# Altium PCB PanelFK.PcbDoc
Units mil, origin at the board's own origin, x right, y up, seen from the top; angles counter-clockwise.
Board outline 6000 x 4000 mil, 2 copper layers (Top Layer, Bottom Layer); 23 components, 16 nets, 71 pads, 0 vias.
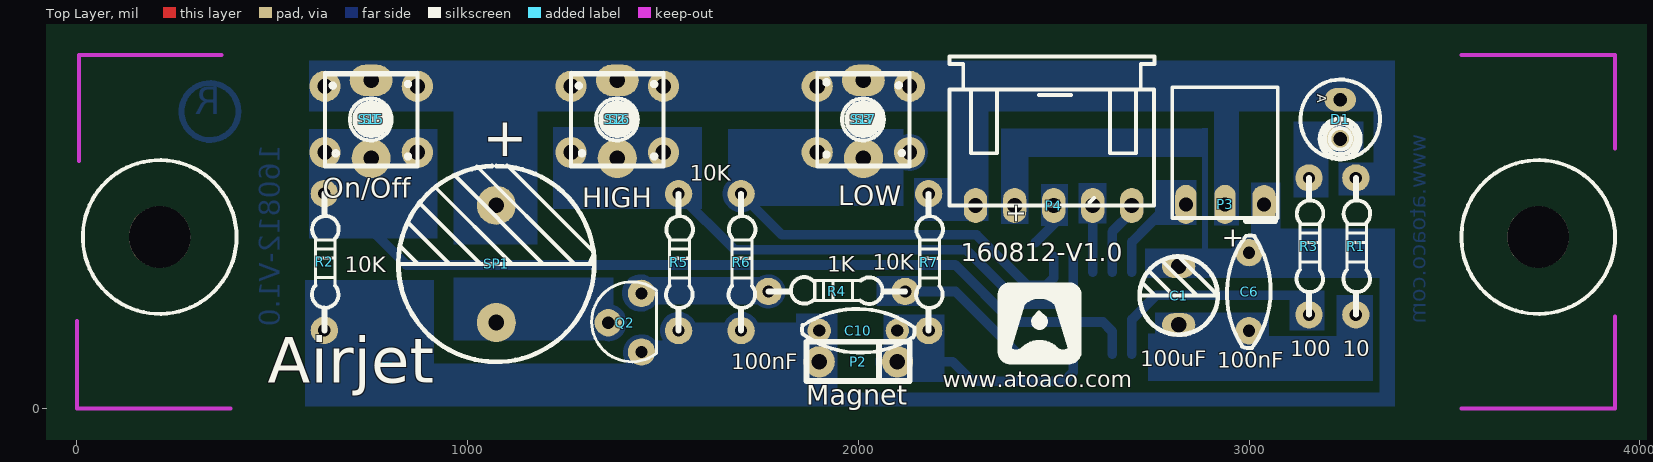
[diagram p0: Top Layer view]
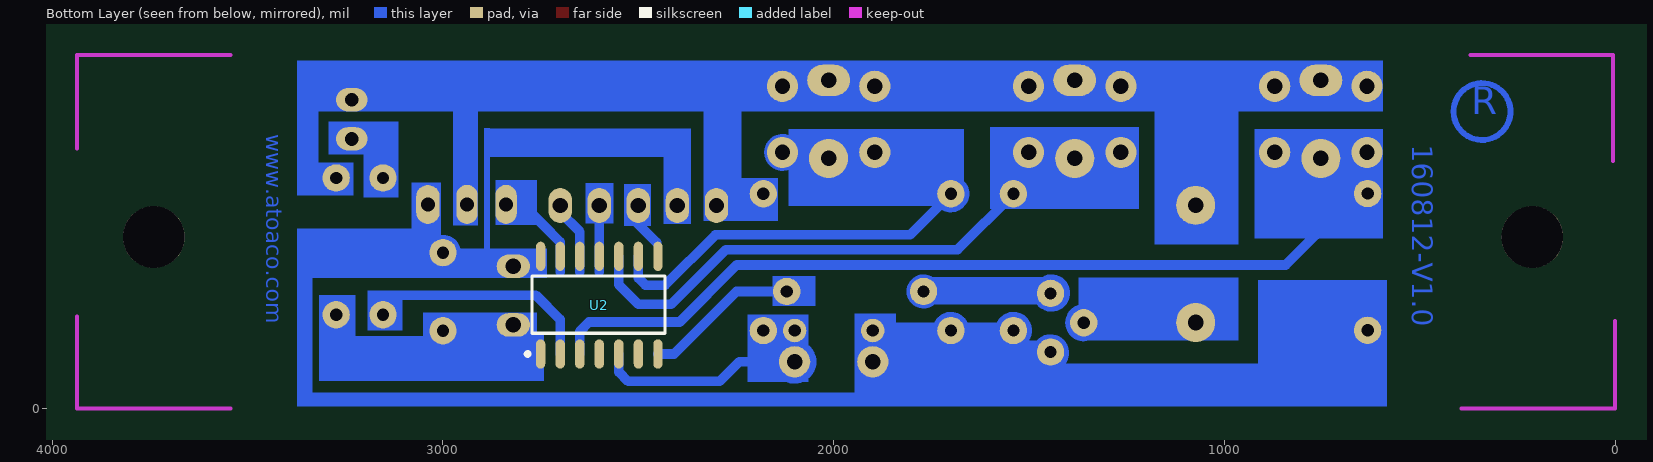
[diagram p1: Bottom Layer view, seen from below]

## Layer stack, top to bottom
Top Layer: signal copper 1.4
Dielectric: dielectric 12.6, FR-4, Dk 4.8
Bottom Layer: signal copper 1.4

## Board outline
-206.55,-741.53 5793.45,-741.53 5793.45,3258.47 -206.55,3258.47

## Design rules (kind name [scope] priority, off if disabled: settings)
Clearance [All] p1: gap=10
PolygonConnect [All] p1: connectstyle=Relief reliefconductorwidth=10 reliefentries=4 polygonreliefangle="90 Angle"
RoutingVias [All] p1: holewidth=28 width=50 viastyle="Through Hole" minholewidth=28 minwidth=50 maxholewidth=28 maxwidth=50
SolderMaskExpansion [All] p1: expansion=4
TestPointUsage [All] p1: valid=0 allowmultiple=FALSE
Testpoint [All] p1: side=15 testpointundercomponent=TRUE minsize=40 maxsize=100 preferedsize=60 minholesize=0 maxholesize=40 preferedholesize=32 testpointgrid=1 style=1023 order=0123456789
Width [All] p1: maxlimit=100 minlimit=10 preferedwidth=10 toplayer_prefwidth=25 bottomlayer_prefwidth=25 minimp=50.000000 maximp=50.000000 favimp=50.000000
19 further rules are at their usual default settings.

## Components (designator, comment, footprint, x,y, rotation, side; value= is the part's Value field where it differs from the comment)
C1 "100uF" RB.15/.2 2820,239.37 r90 top
C6 "100nF" RAD0.2#1 3000,399.37 r270 top
C10 "100nF" RAD0.2#2 1900,200 r0 top
D1 "RED" LED0.5 3233.46,740.55 r270 top
P2 "Magnet" Magnet 2100,120 r180 top
P3 "IrReceiver" IrRec1 2938.19,728.74 r0 top locked
P4 "Header 5" xH5RA 2300,520 r270 top
Q2 "2N3904" TO92BS2 1420,220 r270 top
R1 "10" RES0.35 3273.46,240.55 r90 top
R2 "10K" RES0.35 633.46,200.55 r90 top
R3 "100" RES0.35 3153.46,240.55 r90 top
R4 "1K" RES0.35 2120,300 r180 top
R5 "10K" RES0.35 1540,200 r90 top
R6 "10K" RES0.35 1700,200 r90 top
R7 "10K" RES0.35 2180,200 r90 top
S1 "On/Off" PUSHBOT2 753.15,740.55 r270 top locked
S2 "HIGH" PUSHBOT2 1383.07,740.55 r270 top locked
S3 "LOW" PUSHBOT2 2012.99,740.55 r270 top locked
S15 "100/2W" PUSHBOT4 753.15,740.55 r180 top locked
S16 "100/2W" PUSHBOT4 1383.07,740.55 r180 top locked
S17 "100/2W" PUSHBOT4 2012.99,740.55 r0 top locked
SP1 "BUZZER" RB.3/.6 1073.46,520.55 r90 top
U2 "ATtiny24A-SSU" SOIC14 2750,140 r90 bottom

## Footprints (in the part's own frame and the unit in brackets; to place one, negate y for a bottom-side part, rotate by r counter-clockwise, add the part's x,y. Pads: shape width x height; smd on the part's side, far side on the other; paste and mask are expansions set on the pad)
IrRec1 [mil] "38KHz Ir Receiver"
  oval 55x100 hole 35.43: 1(-99.65,-205.95) 2(0.35,-205.95)
  oval 60x100 hole 35.43: 3(100.35,-205.95)
  silkscreen extent -135,-249 135,94
LED0.5 [mil] "3 color common anode 0.5mm"
  oval 60x80 hole 35.43: 1(-50,0) 2(50,0)
  silkscreen extent -102,-102 102,102
Magnet [mil]
  round 80 hole 39.37: 1(0,0) 2(200,0)
  silkscreen extent -31,-51 232,49
PUSHBOT2 [mil] "NO-2pin"
  oval 80x110 hole 39.37: 1(-100,0)
  round 100 hole 39.37: 2(100,0)
  silkscreen extent -115,-118 121,118
PUSHBOT4 [mm]
  round 2.032 hole 1: 1(3,-2.15) 2(3,2.15) 3(-3,-2.15) 4(-3,2.15)
  silkscreen extent -3,-3 3,3
RAD0.2#1 [mil]
  round 70 hole 31.5: 1(0,0) 2(200,0)
  silkscreen extent -44,-57 244,55
RAD0.2#2 [mil]
  round 60 hole 31.5: 1(0,0) 2(200,0)
  silkscreen extent -44,-57 244,55
RB.3/.6 [mil]
  round 100 hole 40: 1(0,0) 2(-300,0)
  silkscreen extent -401,-251 102,251
RB.15/.2 [mil]
  oval 60x85 hole 39.37: 1(-25,0) 2(125,0)
  silkscreen extent -50,-100 150,100
RES0.35 [mil] "Diode, Axial; Body 5.2 x 2.7 mm (LxDia. max), Lead Dia. 0.86 mm (max)"
  round 70 hole 31.5: 1(0,0)
  round 70 hole 31.5 paste+0: 2(350,0)
  silkscreen extent 0,-37 350,32
SOIC14 [mm] "SOIC, 16-Leads, Body 9.9x3.9mm, Pitch 1.27mm, IPC High Density"
  oval 1.9x0.6 smd: 1(0,0) 2(0,-1.27) 3(0,-2.54) 4(0,-3.81) 5(0,-5.08) 6(0,-6.35) 7(0,-7.62) 8(6.351,-7.62) 9(6.351,-6.35) 10(6.351,-5.08) 11(6.351,-3.81) 12(6.351,-2.54) 13(6.351,-1.27) 14(6.351,0)
  silkscreen extent -0.12,-8.08 5.08,0.98, body extent 0.4,-8.08 5.97,0.51, height 1.75
TO92BS2 [mil] "NPN-CC5551,C945 Base Side"
  round 70 hole 31.5: 1(-75,25) 2(0,-60) 3(75,25)
  silkscreen extent -105,-102 100,63
xH5RA [mil] "100mil between pins"
  oval 90x60 hole 39.37: 1(0,0) 2(0,100) 3(0,200) 4(0,300) 5(0,400)
  silkscreen extent -382,-67 0,458

## Part data
C1 C10: library part Cap, "Capacitor SMD"
C6: library part "Cap Pol", "Polarized Capacitor (SMD)"
D1: library part LED0.5, "LED Radial 0.5"
P2: library part "Header 6", "Header, 6-Pin"
P3: library part "Header 3", "3pin"
P4: "Header, 5-Pin"
Q2: library part BC337, "NPN General Purpose Amplifier"
R1 R2 R3 R4 R5 R6 R7: library part Resistor, "Resistor"
S1 S2 S3: library part SW-PB, "Push Botton"
U2: library part ATtiny24-16PC, "8-Bit AVR Microcontroller with 2K Bytes of Flash Memory"

## Free pads (board coordinates)
  round 157.48 hole 157.48: 2(211.89,439.37) 2(3740.16,439.37)

## Nets (pads, with @x,y where several pads share a name; then routed paths per layer and width w, separated by ;. In a path a pad name is that pad's centre, name@x,y a point inside that pad or via, vN(x,y) a via of type N, cw(c..) or ccw(c..) an arc to the next point about the centre after c; other vN are vias at no path point)
+5V: D1.1 P3.2 P4.1 R1.2 R7.2 S1.1 S2.1 S3.1 S15.1 S15.3 S16.1 S16.3 S17.2 S17.4 SP1.1
BUZZER: R4.1 U2.7 | length 416.3
  Bottom Layer w25: R4.1@2100,300 2249,300 2409,140 U2.7
DIMOUT: P4.3 U2.8 | length 98.7
  Bottom Layer w25: U2.8@2453,425 2503,475 ; P4.3@2500,492 P4.3
GND: C1.2 C6.1 C10.1 P2.2 P3.3 P4.2 Q2.3 R2.1 R5.1 R6.1 U2.14 | length 775.4
  Bottom Layer w25: 1480,143 ccw(c1445,143) 1480,143
  Bottom Layer w35: R5.1@1570.15,200 ccw(c1540,200) R5.1@1570.15,200 ; R6.1@1730.15,200 ccw(c1700,200) R6.1@1730.15,200 ; C6.1@3028.11,399.37 ccw(c3000,399.37) C6.1@3028.11,399.37
IRSEN: P3.1 U2.13 | length 255.3
  Bottom Layer w25: 2700,350.04 2700,427.13 2743.57,470.69 2795.67,522.79 P3.1
KEY1: R2.2 S1.2 S15.2 S15.4 U2.3 | length 2042.9
  Bottom Layer w25: 767,444 843.24,367.76 2248.24,367.76 2394,222 2626,222 2650,198 U2.3
KEY2: R5.2 S2.2 S16.2 S16.4 U2.10 | length 1221
  Bottom Layer w25: R5.2 1683,407 2276,407 2416,267 2500,267 2550,317 U2.10
KEY3: R6.2 S3.2 S17.1 S17.3 U2.9 | length 1333.4
  Bottom Layer w25: R6.2 1805,445 2303,445 2432,316 2482,316 2500,334 U2.9
  Bottom Layer w35: R6.2@1729.83,550 ccw(c1700,550) R6.2@1729.83,550 ; S17.1@2160.63,655.91 ccw(c2131.1,655.91) S17.1@2160.63,655.91
LED: R3.1 U2.2 | length 567.4
  Bottom Layer w25: U2.2 2700,228 2762.55,290.55 3153.46,290.55
MAGNET: C10.2 P2.1 R7.1 U2.5 | length 767.5
  Bottom Layer w25: P2.1 2242,120 2292,70 2526,70 2550,94 U2.5
  Bottom Layer w35: P2.1@2138.33,120 ccw(c2100,120) P2.1@2138.33,120
NetD1_2: D1.2 R3.2
NetQ2_1: Q2.1 R4.2 | length 385.5
  Bottom Layer w25: Q2.1@1478,296 ccw(c1442.64,296) Q2.1@1478,296
  Bottom Layer w35: R4.2@1796,300 ccw(c1770,300) R4.2@1796,300
NetQ2_2: Q2.2 SP1.2 | length 219.9
  Bottom Layer w25: 1395,220 ccw(c1360,220) 1395,220
RELAY1: P4.4 U2.11 | length 184.1
  Bottom Layer w25: P4.4@2590,510 P4.4 2600,350.04
VMIC: C1.1 C6.2 R1.1 U2.1
ZEROC: P4.5 U2.12 | length 190.7
  Bottom Layer w25: 2650,350.04 2650,453 2700,503 P4.5
pads on no net: U2.4 U2.6
copper on no net: | length 457.4
  Bottom Layer w15: 413.46,760.55 ccw(c340.66,760.55) 413.46,760.55

## Keep-outs
Keep-Out Layer:
  lines w10: 0,225 0,0 393.7,0 ; 5,634.37 5,905.51 370,905.51 ; 3543.31,0 3937.01,0 3937.01,236.22 ; 3543.31,905.51 3937.01,905.51 3937.01,666

## Other copper
Bottom Layer:
  rectangle net GND: 1840,220 1947,244
  rectangle net BUZZER: 2046,263 2157,340
  rectangle net RELAY1: 2564,474 2635,578
  rectangle net DIMOUT: 2467,467 2537,575
  rectangle net +5V: 2143,480 2235.46,591
  rectangle net +5V: 593.46,760.55 3373.46,890.55
  rectangle net +5V: 3318.46,545.55 3373.46,760.55
  rectangle net +5V: 3228.46,545.55 3318.46,630.55
  rectangle net +5V: 2910,469.37 2975,774.37
  rectangle net GND: 3005,355.37 3080,579.37
  rectangle net GND: 2733.46,334 3023.46,409.37
  rectangle net VMIC: 2741,71 3051,192.37
  rectangle net VMIC: 2760,192.37 3051,246.37
  rectangle net VMIC: 3051,71 3317,185.55
  rectangle net VMIC: 3223.46,121 3317,290.55
  rectangle net NetD1_2: 3113.46,650.55 3293.46,735.55
  rectangle net NetD1_2: 3113.46,540.55 3203.46,650.55
  rectangle net IRSEN: 2759,470.55 2865,585.55
  rectangle net LED: 3103.46,200.55 3193.46,302
  rectangle net +5V: 2235.46,480 2333,783.55
  rectangle net +5V: 963.46,420.55 1178.46,760.55
  rectangle net KEY3: 1666,519 2116,715.55
  rectangle net KEY2: 1218.46,510.55 1600,720.55
  rectangle net KEY1: 593.46,435.55 923.46,715.55
  rectangle net MAGNET: 2065,68 2221,241
  rectangle net GND: 2365,473 2435,687
  rectangle net GND: 2365,644 2895,717
  rectangle net GND: 2880,392.37 2895,718
  rectangle net GND: 1529,25 1947,220
  rectangle net GND: 584.46,42 1609,116
  rectangle net GND: 584.46,116 913.46,329
  rectangle net GND: 1472,99 1550,175
  rectangle net NetQ2_2: 963.46,175 1193.46,335.55
  rectangle net NetQ2_2: 1193.46,175 1373,335.55
  rectangle net GND: 3023.46,334 3373.46,460.55
  rectangle net GND: 3333.46,6 3373.46,355.55
  rectangle net GND: 584.46,5.37 3339,42
  rectangle net NetQ2_1: 1455,267 1790,337
  text "R" at 368.46,730.55 h120
  text "www.atoaco.com" at 3467,702 h70 r90
  text "160812-V1.0" at 537,676 h90 r90

## Silkscreen, mask and mechanical layers (free items; w line width, h text height)
Top Overlay:
  circle w10: c211.89,439.37 r196.85
  circle w10: c3740.16,439.37 r196.85
  region: 2467.71,241.62 2476.4,232.93 2476.4,218.44 2466.4,208.44 2456.4,208.44 2451.4,213.44 2451.4,232.88 2450.92,233.36
  region: 2381.4,318.44 2541.4,318.44 2556.4,313.44 2561.4,298.44 2561.4,148.44 2566.4,143.44 2561.4,128.44 2546.4,123.44 2391.4,123.44 2386.4,118.44 2371.4,128.44 2361.4,143.44 2361.4,168.44 2376.4,163.44 2394.85,178.65 2399.72,195.09 2421.4,268.44 2441.4,283.44 2481.4,288.44 2501.4,268.44 2506.4,268.44 2506.4,260.83 2516.27,250.96 2516.27,226.01 2524.62,217.66 2524.62,194.5 2534.28,184.84 2534.28,166.92 2541.4,159.81 2541.4,153.44 2536.4,153.44 2526.4,143.44 2511.4,143.44 2486.4,168.44 2436.4,168.44 2416.4,148.44 2391.4,148.44 2386.4,153.44 2394.86,178.67 2376.4,163.44 2361.4,168.44 2361.4,293.44
  lines w10: 2361.4,288.44 2361.4,148.44 ccw(c2388.9,145.94) 2386.4,118.44 2536.4,118.44 ccw(c2538.9,145.94) 2566.4,143.44 2566.4,288.44 ccw(c2538.9,290.94) 2541.4,318.44 2391.4,318.44 ccw(c2388.9,290.94) 2361.4,293.44 ; 2386.4,153.44 ccw(c2403.9,170.94) 2421.4,153.44 cw(c2463.9,110.94) 2506.4,153.44 ccw(c2523.9,170.94) 2541.4,153.44 2507.07,265.98 ; 2387.4,153.44 2421.4,268.44 cw(c2463.9,225.94) 2506.4,268.44 ; 2450.92,233.36 ccw(c2464,223.24) 2476.9,233.61 2462.27,246.37 2450.92,233.36
  text "+" at 1038.46,645.55 h100
  text "+" at 2368.46,525.55 h80 r270
  text "+" at 2930,414.37 h50
  text "160812-V1.0" at 2262,362 h80
  text "www.atoaco.com" at 2216,41 h70
  text "Airjet" at 489,28 h200
  text "Magnet" at 1867,10 h50

## Text inside footprints (layer, text, board x,y; h text height)
D1: Top Overlay "A" at 3166.54,805.32 h39.37 r270